# Altium PCB MDBU003_Layout.PcbDoc (part 1 of 2)
Units mil, origin at the board's own origin, x right, y up, seen from the top; angles counter-clockwise.
Board outline 2000 x 2200 mil, 4 copper layers (Component Side, Ground Plane, Power Plane, Solder Side), stack 31.834 mil thick; 88 components, 65 nets, 283 pads, 338 vias.
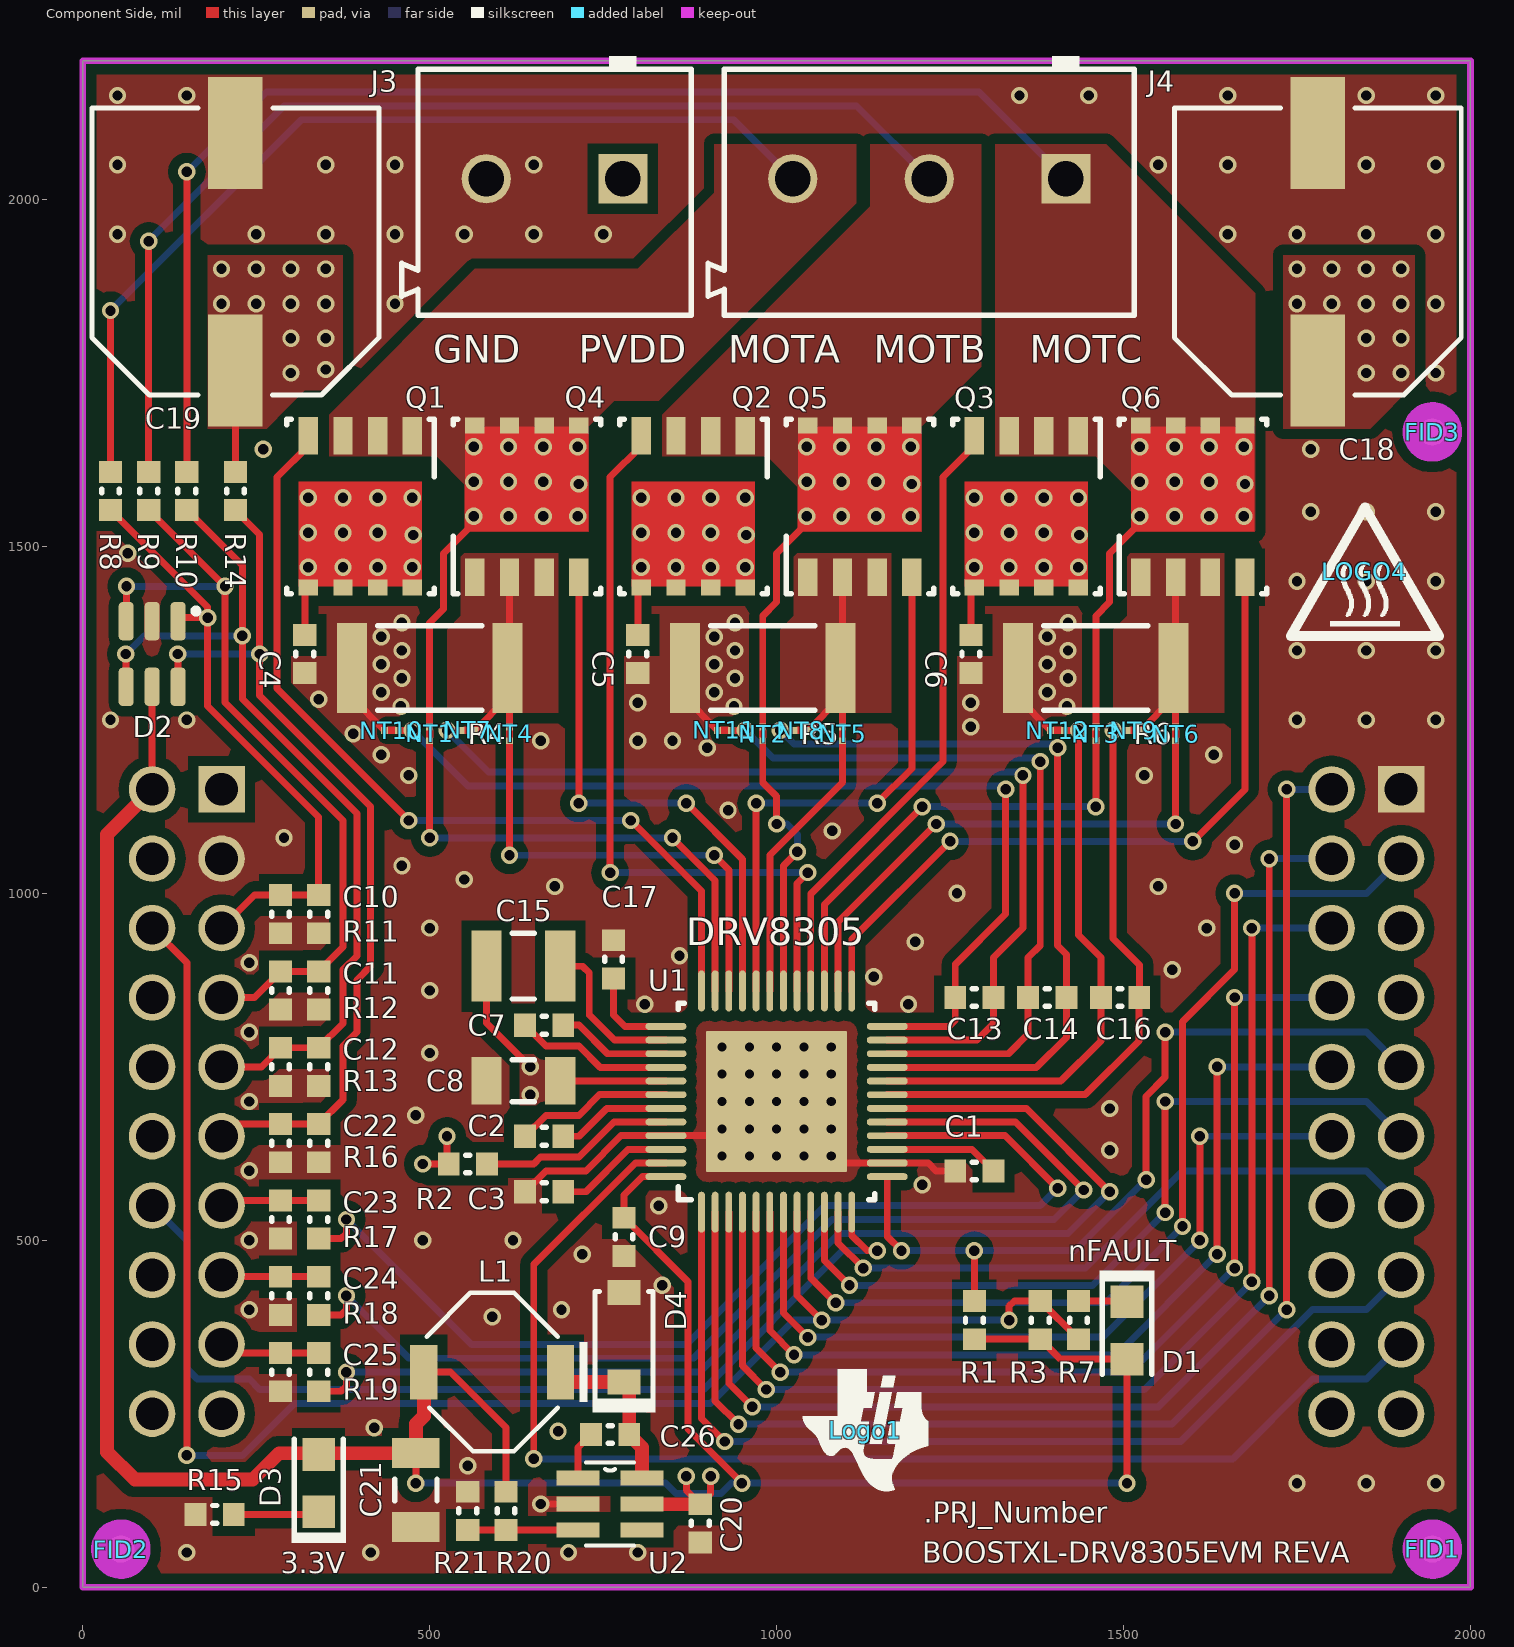
[diagram p0: Component Side view]
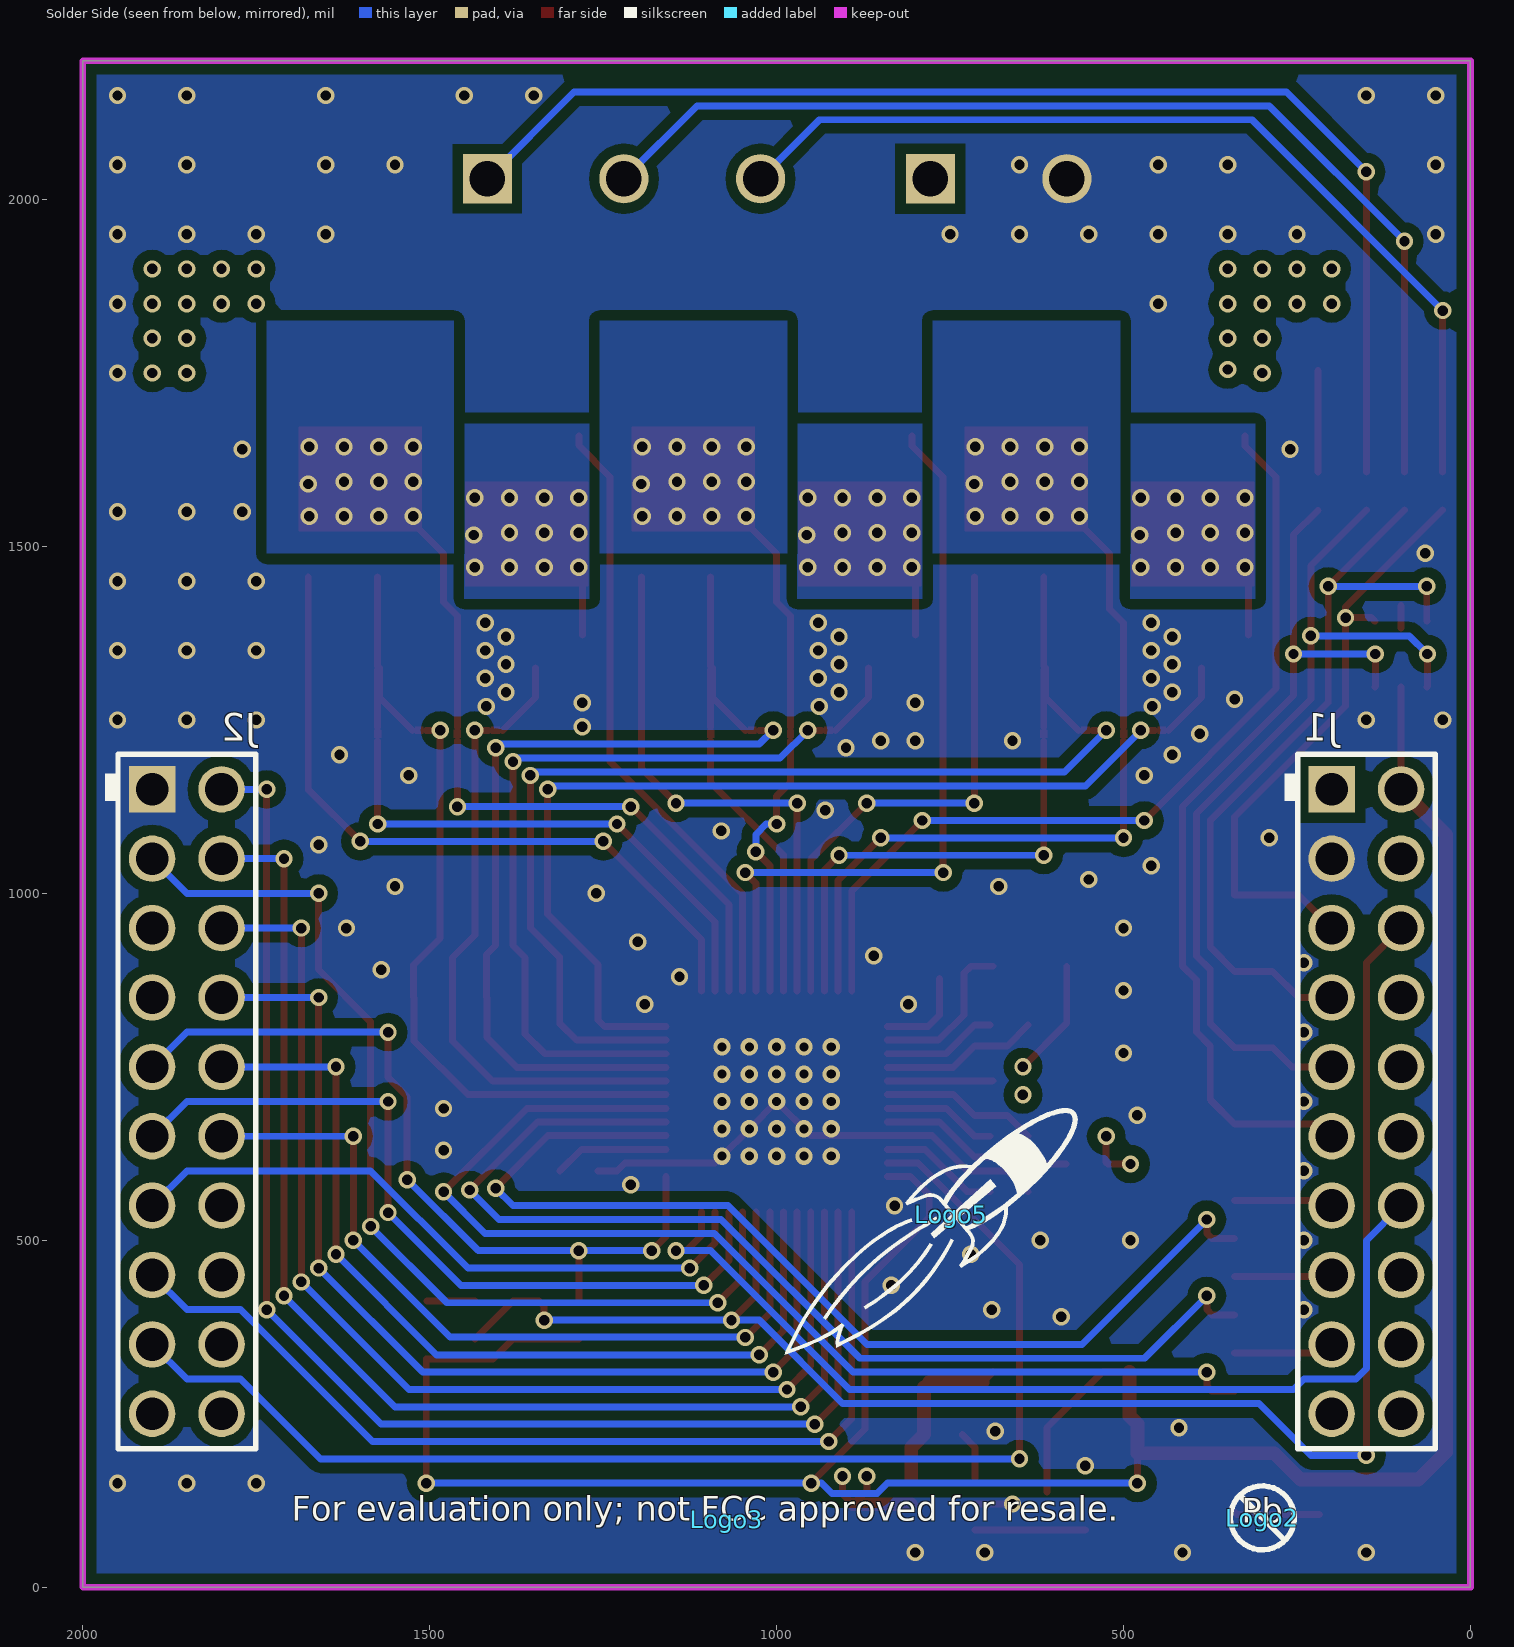
[diagram p1: Solder Side view, seen from below]
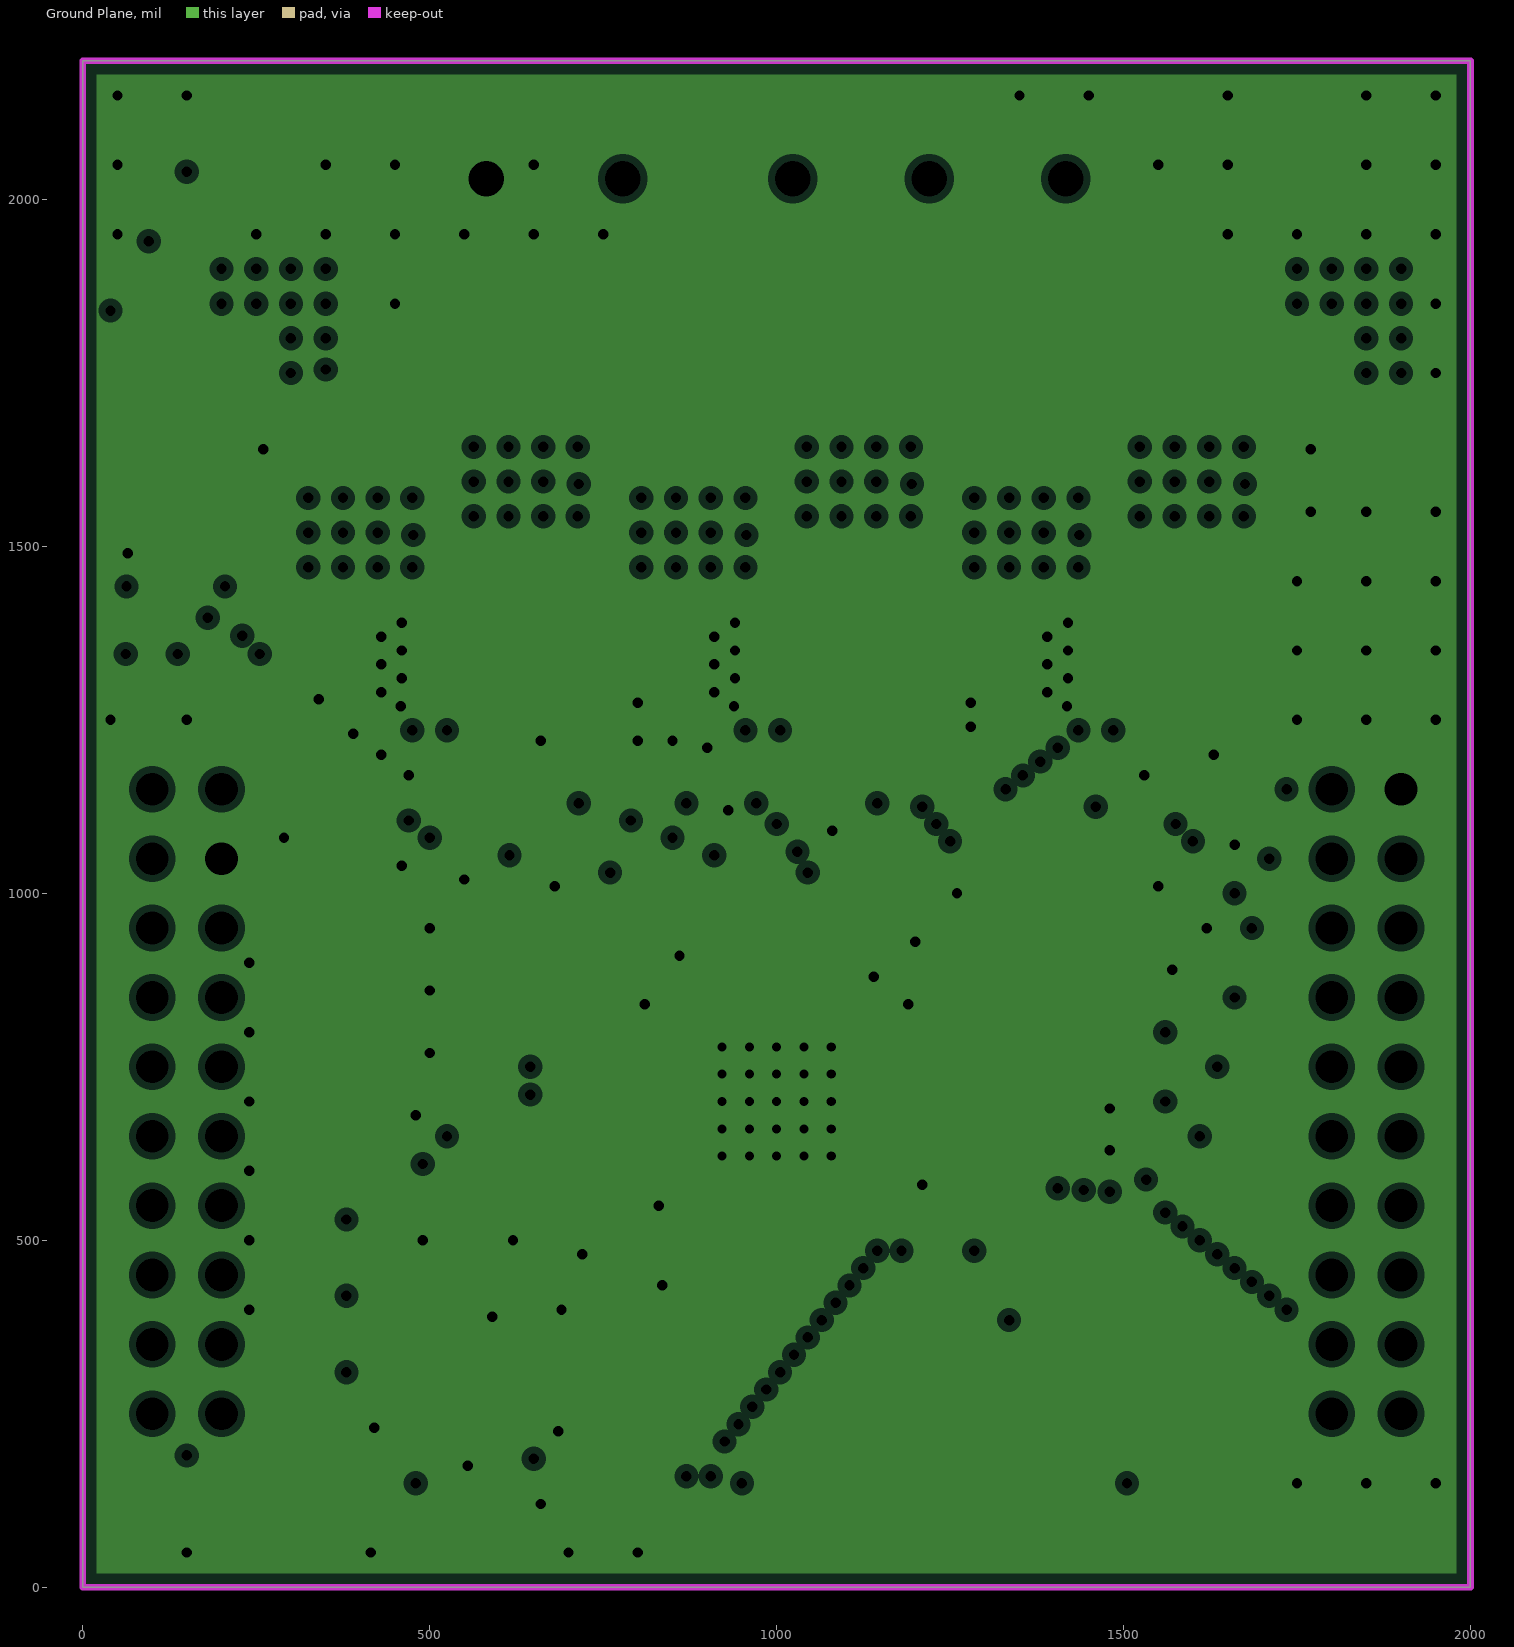
[diagram p2: Ground Plane, clearances drawn from the general rule]
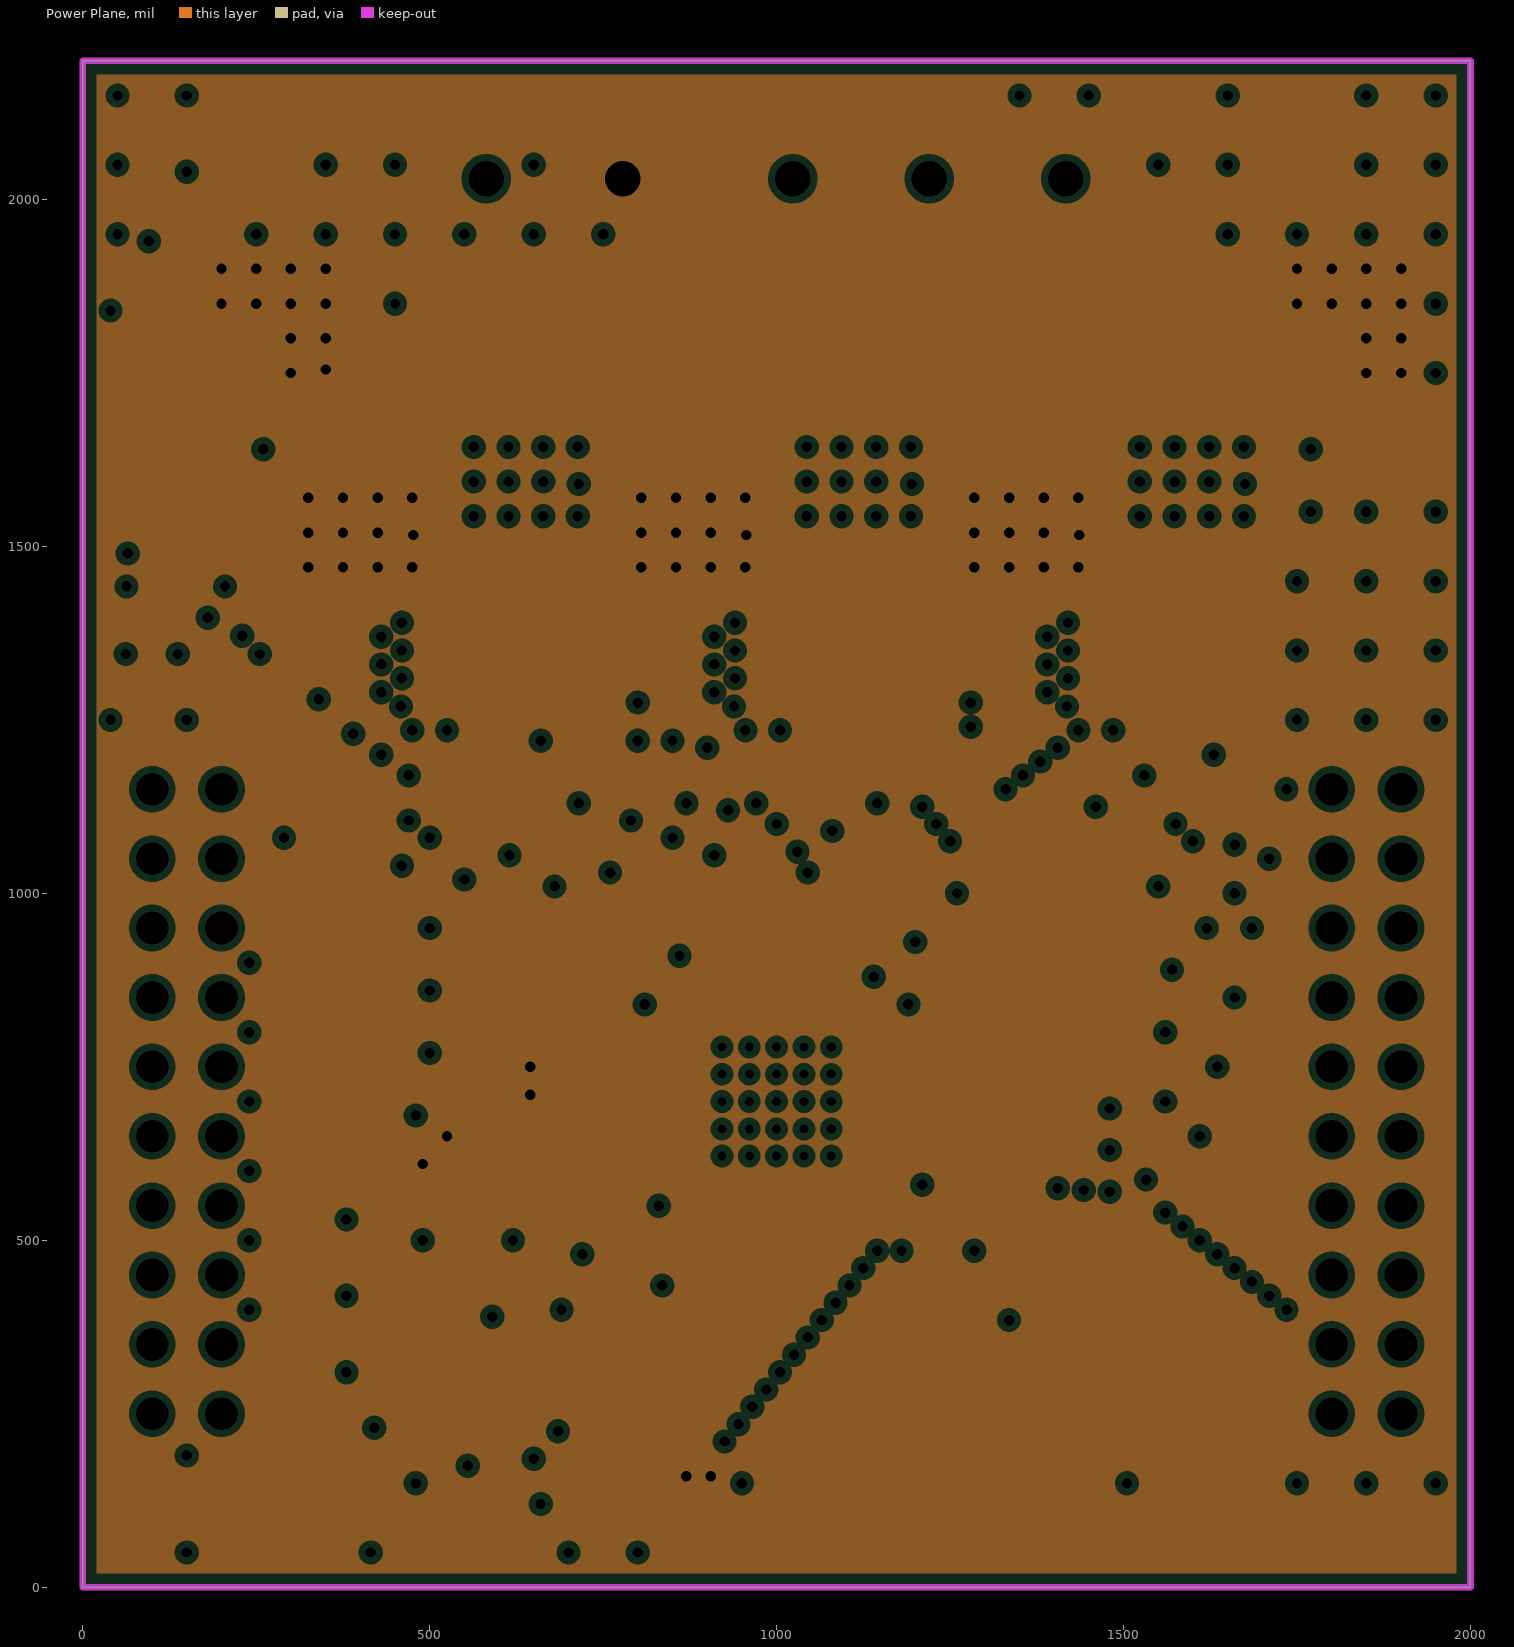
[diagram p3: Power Plane, clearances drawn from the general rule]

## Layer stack, top to bottom
Top Solder: solder mask 0.4, Solder Resist, Dk 3.5
Component Side: signal copper 2
Dielectric 1: prepreg 10, FR-4, Dk 4.2
Ground Plane: plane copper 1.417, net GND
Dielectric 3: core 5, Dk 4.2
Power Plane: plane copper 1.417, net PVDD
Dielectric 4: prepreg 10, Dk 4.2
Solder Side: signal copper 2
Bottom Solder: solder mask 0.4, Solder Resist, Dk 3.5

## Board outline
0,0 2000,0 2000,2200 0,2200

## Design rules (kind name [scope] priority, off if disabled: settings)
AcuteAngle [All] p1: minimum=4.50000000000000E+0001 checktracksonly=FALSE
AssemblyTestPointUsage [All] p1: valid=2
Clearance Clearance_Keepouts [((IsTrack Or IsArc) And Not InPoly) And IsFree and IsKeepOut vs ((IsTrack Or IsArc) And Not InPoly) And IsFree and IsKeepOut] p1: gap=0
Clearance Clearance_BoardEdge_MountingHoles [OnCopper and InComponentClass('Mounting Holes') vs IsKeepOut] p2: gap=40
Clearance Clearance_BoardEdge_Poly [OnCopper and InPoly vs IsKeepOut] p3: gap=15
Clearance Clearance_BoardEdge [OnCopper and Not InComponentClass('Logo') and not InComponentClass('FiducialMark') and not InRegion(1000,500,4000,800) and Not IsKeepout vs IsKeepOut] p4: gap=15
Clearance Clearance_Poly [InPolygon] p5: gap=15
Clearance [All] p6: gap=7
ComponentClearance ComponentClearance_MountingHoles_FiducialMarks [InComponentClass('Mounting Holes') vs InComponentClass('FiducialMark')] p1: gap=20 collisioncheckmode=3 verticalgap=10 showdistances=FALSE
ComponentClearance ComponentClearance_Shunt [InComponentClass('Header') vs InComponentClass('Shunt')] p2: gap=0 collisioncheckmode=3 verticalgap=0 showdistances=FALSE
ComponentClearance ComponentClearance_Logo [InComponentClass('Logo')] p3: gap=10 collisioncheckmode=3 verticalgap=10 showdistances=FALSE
ComponentClearance ComponentClearance_ScrewToNut [(HasFootprint('NY PMS 440 0025 PH')) vs (HasFootprint('Keystone_1902C'))] p4: gap=5 collisioncheckmode=3 verticalgap=10 showdistances=FALSE
ComponentClearance ComponentClearance_MountingHoles [InComponentClass('Mounting Holes')] p5: gap=250 collisioncheckmode=3 verticalgap=100000 showdistances=FALSE
ComponentClearance ComponentClearance_SmallPassives [HasFootprint('0201*') or HasFootprint('0402*') or HasFootprint('0508') or HasFootprint('0603*') or HasFootprint('0612') or HasFootprint('0805*') or HasFootprint('0815*') or HasFootprint('0830*') or HasFootprint('1206*') or HasFootprint('1210*') or HasFootprint('1808*') or HasFootprint('1812*') or HasFootprint('1825*') or HasFootprint('2010*') or HasFootprint('2220*') or HasFootprint('2225*') or HasFootprint('2512*') or HasFootprint('2728*') or HasFootprint('3518*') vs HasFootprint('0201*') or HasFootprint('0402*') or HasFootprint('0508') or HasFootprint('0603*') or HasFootprint('0612') or HasFootprint('0805*') or HasFootprint('0815*') or HasFootprint('0830*') or HasFootprint('1206*') or HasFootprint('1210*') or HasFootprint('1808*') or HasFootprint('1812*') or HasFootprint('1825*') or HasFootprint('2010*') or HasFootprint('2220*') or HasFootprint('2225*') or HasFootprint('2512*') or HasFootprint('2728*') or HasFootprint('3518*')] p6: gap=10 collisioncheckmode=3 verticalgap=10 showdistances=FALSE
ComponentClearance ComponentClearance_THtoSMT [IsThruComponent vs IsSMTComponent] p7: gap=10 collisioncheckmode=3 verticalgap=30 showdistances=FALSE
ComponentClearance ComponentClearance_THtoTH [IsThruComponent vs IsThruComponent] p8: gap=10 collisioncheckmode=3 verticalgap=30 showdistances=FALSE
ComponentClearance [All] p9: gap=10 collisioncheckmode=3 verticalgap=10 showdistances=FALSE
DiffPairsRouting [All] p1: maxlimit=100 minlimit=10 mostfreqgap=10 toplayer_minwidth=15 toplayer_maxwidth=15 toplayer_prefwidth=15 bottomlayer_minwidth=15 bottomlayer_maxwidth=15 bottomlayer_prefwidth=15 maxuncoupledlength=1000
FabricationTestPointUsage TestPointUsage [All] p1: valid=2 allowmultiple=FALSE
FabricationTestpoint Testpoint [All] p1: side=3 testpointundercomponent=TRUE minsize=40 maxsize=100 preferedsize=60 minholesize=0 maxholesize=40 preferedholesize=32 testpointgrid=1 allowsidetop=TRUE allowsidebottom=TRUE usegrid=TRUE gridtolerance=0.01
FanoutControl Fanout_LCC [IsLCC] p1: bgadir=Out bgaviamode=Centered fanoutstyle=Auto fanoutdirection=Alternating viagrid=1 // Fanout_LCC (Default Rule)
FanoutControl Fanout_BGA [IsBGA] p2: bgadir=Out bgaviamode=Centered fanoutstyle=Auto fanoutdirection=Alternating viagrid=1 // Fanout_BGA (Default Rule)
FanoutControl Fanout_Default [All] p4: bgadir=Out bgaviamode=Centered fanoutstyle=Auto fanoutdirection=Alternating viagrid=1 // Fanout_Default (Default Rule)
FanoutControl Fanout_Small [(CompPinCount < 5)] p5: bgadir=Out bgaviamode=Centered fanoutstyle=Auto fanoutdirection=OutThenIn viagrid=1 // Fanout_Small (Default Rule)
HoleSize [All] p1: absolutevalues=TRUE maxlimit=251 minlimit=8 maxpercent=80.000 minpercent=20.000
MinimumAnnularRing MinimumAnnularRing_ThermalPadVias [IsVia and InAnyComponent] p1: minimumring=5.91
MinimumAnnularRing [All] p2: minimumring=5
MinimumSolderMaskSliver MinimumSolderMaskSliver_Logo [InComponentClass('Logo') vs InComponentClass('Logo')] p1: minsoldermaskwidth=0.7
MinimumSolderMaskSliver [All] p2: minsoldermaskwidth=3.94
PlaneClearance [All] p1: clearance=10
PlaneConnect [All] p1: planeconnectstyle=Relief reliefexpansion=10 reliefentries=4 reliefconductorwidth=10 reliefairgap=10
PolygonConnect [All] p1: connectstyle=Direct reliefconductorwidth=10 reliefentries=4 polygonreliefangle="90 Angle" airgapwidth=10
RoutingVias ThermalPadVias [IsVia and InAnyComponent] p1: holewidth=7.87 width=19.68 viastyle="Through Hole" minholewidth=7.87 minwidth=19.68 maxholewidth=15 maxwidth=25
RoutingVias [All] p2: holewidth=15 width=25 viastyle="Through Hole" minholewidth=7.87 minwidth=20 maxholewidth=40 maxwidth=65
SilkToBoardRegionClearance [Not ((IsComment or IsDesignator) And (Hide <> 'False')) and not InRegion(1000,500,4000,800)] p1:
SilkToSilkClearance SilkToSilkClearance_Pb-FreeLogo [(HasFootprint('Pb-Free_Overlay_Medium') OR HasFootprint('Pb-Free_Overlay_Small')) vs (HasFootprint('Pb-Free_Overlay_Medium') OR HasFootprint('Pb-Free_Overlay_Small'))] p1: silktosilkclearance=0
SilkToSilkClearance [All] p2: silktosilkclearance=5
SilkToSolderMaskClearance "Silk to Solder Mask Opening" [All] p1: minsilkscreentomaskgap=1 clearancetoexposedcopper=FALSE
SolderMaskExpansion [All] p1: expansion=1.97
UnpouredPolygon [All] p1: allowunpoured=FALSE
Width [All] p1: maxlimit=100 minlimit=6 preferedwidth=10 checkconnectedcopper=TRUE
13 further rules are at their usual default settings.

## Classes and differential pairs
component class MDBU003_Schematic: C1 C2 C3 C4 C5 C6 C7 C8 C9 C10 C11 C12 C13 C14 C15 C16 C17 C18 C19 C20 C21 C22 C23 C24 C25 C26 D1 D2 D3 D4 J1 J2 J3 J4 L1 NT1 NT2 NT3 NT4 NT5 NT6 NT7 NT8 NT9 NT10 NT11 NT12 Q1 Q2 Q3 Q4 Q5 Q6 R1 R2 R3 R4 R5 R6 R7 R8 R9 R10 R11 R12 R13 R14 R15 R16 R17 R18 R19 R20 R21 U1 U2
component class AssemblyNote: ZZ1 ZZ2 ZZ3 ZZ4
component class FiducialMark: FID1 FID2 FID3
component class MDBU003_Hardware: FID1 FID2 FID3 Logo1 Logo2 Logo3 LOGO4 Logo5 ZZ1 ZZ2 ZZ3 ZZ4
component class Logo: Logo1

## Components (designator, comment, footprint, x,y, rotation, side; value= is the part's Value field where it differs from the comment)
C1 "C1608X7R1C105K" 0603L 1285,600 r0 top
C2 "C0603C473K1RACTU" 0603L 665,650 r180 top
C3 "C1608X7R1C105K" 0603L 665,570 r0 top
C4 "UMK107AB7105KA-T" 0603L 320,1345 r270 top
C5 "UMK107AB7105KA-T" 0603L 800,1345 r270 top
C6 "UMK107AB7105KA-T" 0603L 1280,1345 r270 top
C7 "C0603C473K1RACTU" 0603L 665,810 r180 top
C8 "GRM31CR71H475KA12L" 1206L 635,730 r0 top
C9 "C1608X7R1C105K" 0603L 780,505 r90 top
C10 "C0603C104J4RACTU" 0603L 285,970 r270 top
C11 "C0603C104J4RACTU" 0603L 285,860 r270 top
C12 "C0603C104J4RACTU" 0603L 285,750 r270 top
C13 "GRM188R71C102KA01D" 0603L 1285,850 r180 top
C14 "GRM188R71C102KA01D" 0603L 1390,850 r180 top
C15 "GRM32ER72A225KA35L" 1210L 635,895 r0 top
C16 "GRM188R71C102KA01D" 0603L 1495,850 r180 top
C17 "C1608X7R1C105K" 0603L 765,905 r90 top
C18 "EEE-FT1H331AP" SM_RADIAL_G 1780,1925 r90 top
C19 "EEE-FT1H331AP" SM_RADIAL_G 220,1925 r90 top
C20 "UMK107AB7105KA-T" 0603L 890,92 r270 top
C21 "GRM31CR71A226KE15L" 1206L 480,140 r270 top
C22 "C0603C104J4RACTU" 0603L 285,640 r270 top
C23 "GRM188R71C222KA01D" 0603L 285,530 r270 top
C24 "GRM188R71C222KA01D" 0603L 285,420 r270 top
C25 "GRM188R71C222KA01D" 0603L 285,310 r270 top
C26 "GRM188R71C334KA01D" 0603L 760,220 r180 top
D1 "LTST-C170KRKT" LED_LTST-C170 1505,370 r90 top
D2 "NUP4201MR6T1G" TSOP-6 100,1345 r270 top
D3 "LTST-C171GKT" LED_LTST-C171 340,150 r270 top
D4 "MBR1H100SFT3G" SOD-123FL 780,360 r90 top
FID1 "Fiducial" Fiducial10-20 1945,55 r0 top
FID2 "Fiducial" Fiducial10-20 55,55 r0 top
FID3 "Fiducial" Fiducial10-20 1945,1665 r0 top
J1 "CRD-081413-A-G" Major_CRD-081413-A-x 150,700 r0 bottom
J2 "CRD-081413-A-G" Major_CRD-081413-A-x 1850,700 r0 bottom
J3 "691 101 710 002" Wurth_691101710002 680,2030 r180 top
J4 "691 101 710 003" Wurth_691101710003 1220,2030 r180 top
L1 "SD53-150-R" SD53 590,310 r180 top
Logo1 "Texas Instruments" TI_Symbol_Overlay_Small 1128,226 r0 top
Logo2 "Pb-Free Symbol" Pb-Free_Overlay_Small 300,100 r180 bottom
Logo3 "FCC disclaimer" FCC_disclaimer 1071.86,98.28 r180 bottom
LOGO4 "CAUTION HOT SURFACE" IEC_HotSurface_Small 1848,1464 r0 top
Logo5 "LaunchPad Rocket" LaunchPadRocket_Small 748,537 r180 bottom
NT1 "Net-Tie" Net-Tie_10mil 500,1230 r90 top net-tie
NT2 "Net-Tie" Net-Tie_10mil 980,1230 r90 top net-tie
NT3 "Net-Tie" Net-Tie_10mil 1460,1230 r90 top net-tie
NT4 "Net-Tie" Net-Tie_10mil 615,1230 r90 top net-tie
NT5 "Net-Tie" Net-Tie_10mil 1095,1230 r90 top net-tie
NT6 "Net-Tie" Net-Tie_10mil 1575,1230 r90 top net-tie
NT7 "Net-Tie" Net-Tie_10mil 555,1235 r0 top net-tie
NT8 "Net-Tie" Net-Tie_10mil 1035,1235 r0 top net-tie
NT9 "Net-Tie" Net-Tie_10mil 1515,1235 r0 top net-tie
NT10 "Net-Tie" Net-Tie_10mil 445,1235 r180 top net-tie
NT11 "Net-Tie" Net-Tie_10mil 925,1235 r180 top net-tie
NT12 "Net-Tie" Net-Tie_10mil 1405,1235 r180 top net-tie
Q1 "CSD18540Q5B" TRANS_NexFET_Q5B 400,1550 r270 top
Q2 "CSD18540Q5B" TRANS_NexFET_Q5B 880,1550 r270 top
Q3 "CSD18540Q5B" TRANS_NexFET_Q5B 1360,1550 r270 top
Q4 "CSD18540Q5B" TRANS_NexFET_Q5B 640,1565 r90 top
Q5 "CSD18540Q5B" TRANS_NexFET_Q5B 1120,1565 r90 top
Q6 "CSD18540Q5B" TRANS_NexFET_Q5B 1600,1565 r90 top
R1 "CRCW060310K0JNEA" 0603L 1285,385 r270 top
R2 "CRCW0603100RJNEA" 0603L 555,610 r180 top
R3 "CRCW060310K0JNEA" 0603L 1380,385 r270 top
R4 "CRE2512-FZ-R007E-3" 2512L 500,1325 r0 top
R5 "CRE2512-FZ-R007E-3" 2512L 980,1325 r0 top
R6 "CRE2512-FZ-R007E-3" 2512L 1460,1325 r0 top
R7 "CRCW0603330RJNEA" 0603L 1435,385 r90 top
R8 "RC0603FR-0762KL" 0603L 40,1580 r90 top
R9 "RC0603FR-0762KL" 0603L 95,1580 r90 top
R10 "RC0603FR-0762KL" 0603L 150,1580 r90 top
R11 "RC0603FR-074K99L" 0603L 340,970 r90 top
R12 "RC0603FR-074K99L" 0603L 340,860 r90 top
R13 "RC0603FR-074K99L" 0603L 340,750 r90 top
R14 "RC0603FR-0762KL" 0603L 220,1580 r90 top
R15 "CRCW0603330RJNEA" 0603L 190,105 r0 top
R16 "RC0603FR-074K99L" 0603L 340,640 r90 top
R17 "CRCW060356R0JNEA" 0603L 340,530 r270 top
R18 "CRCW060356R0JNEA" 0603L 340,420 r270 top
R19 "CRCW060356R0JNEA" 0603L 340,310 r270 top
R20 "RC0603FR-0768KL" 0603L 610,110 r90 top
R21 "CRCW060320K0FKEA" 0603L 555,110 r270 top
U1 "DRV8305NPHPQ1" PHP0048G_L 1000,700 r90 top
U2 "LMR16006XDDC" DDC0006A_N 760,120 r0 top
ZZ1 "This Assembly Note is for PCB labels only" AssemblyNoteLabel 27,2664 r0 top
ZZ2 "These assemblies are ESD sensitive, ESD precautions shall be observed." AssemblyNote 27,2555.11 r0 top
ZZ3 "These assemblies must be clean and free from flux and all contaminants. Use of no clean flux is not acceptable." AssemblyNote 27,2466.56 r0 top
ZZ4 "These assemblies must comply with workmanship standards IPC-A-610 Class 2, unless otherwise specified." AssemblyNote 27,2378 r0 top

## Footprints (in the part's own frame and the unit in brackets; to place one, negate y for a bottom-side part, rotate by r counter-clockwise, add the part's x,y. Pads: shape width x height; smd on the part's side, far side on the other; paste and mask are expansions set on the pad)
0603L [mm] "0603 from SM-752 data"
  rect 0.8x0.85 smd: 1(-0.7,0) 2(0.7,0)
  silkscreen extent -0.07,-0.33 0.07,0.33, body extent -0.87,-0.47 0.87,0.47, height 0.85
1206L [mm] "1206 from SM-752 data"
  rect 1.1x1.75 smd: 1(-1.35,0) 2(1.35,0)
  silkscreen extent -0.4,-0.77 0.4,0.77, body extent -1.7,-0.9 1.7,0.9, height 1.35
1210L [mm] "1210 from SM-752 data"
  rect 1.1x2.6 smd: 1(-1.35,0) 2(1.35,0)
  silkscreen extent -0.4,-1.2 0.4,1.2, body extent -1.7,-1.35 1.7,1.35, height 1.35
2512L [mm] "Chip Resistor, Body 6.3x3.2mm, IPC High Density"
  rect 1.1x3.3 smd: 1(-2.85,0) 2(2.85,0)
  silkscreen extent -1.9,-1.55 1.9,1.55, body extent -3.22,-1.67 3.22,1.67, height 0.71
AssemblyNote [mil] "Assembly Note"
AssemblyNoteLabel [mil] "Assembly Note for PCB Labels"
DDC0006A_N [mil]
  rect 62x22 smd: 1(-46,37.4) 2(-46,0) 3(-46,-37.4) 4(46,-37.4) 5(46,0) 6(46,37.4)
  silkscreen extent -34,-60 34,60, body extent -56,-58 56,58, height 35
FCC_disclaimer [mil]
Fiducial10-20 [mm]
  round 1 smd mask+0.5: 1(0,0)
  Component Side keep-out circle w1.178: c0,0 r0.5
IEC_HotSurface_Small [mil]
  silkscreen extent -107,-93 107,92
LaunchPadRocket_Small [mil]
  silkscreen extent -241,-202 182,153
LED_LTST-C170 [mm] "LITE-ON"
  rect 1.2x1.2 smd: 1(-1.05,0) 2(1.05,0)
  silkscreen extent -1.6,-1 2.2,1, body extent -1.05,-0.67 1.05,0.67, height 1.1
LED_LTST-C171 [mm] "LITE-ON"
  rect 1.2x1.2 smd: 1(-1.05,0) 2(1.05,0)
  silkscreen extent -1.6,-1 2.2,1, body extent -1.05,-0.67 1.05,0.67, height 0.8
Major_CRD-081413-A-x [mm] "Receptacle, 2.54 mm, 10x2, TH"
  rect 1.7x1.7 hole 1.2: 1(1.27,-11.43)
  round 1.7 hole 1.2: 2(-1.27,-11.43) 3(1.27,-8.89) 4(-1.27,-8.89) 5(1.27,-6.35) 6(-1.27,-6.35) 7(1.27,-3.81) 8(-1.27,-3.81) 9(1.27,-1.27) 10(-1.27,-1.27) 11(1.27,1.27) 12(-1.27,1.27) 13(1.27,3.81) 14(-1.27,3.81) 15(1.27,6.35) 16(-1.27,6.35) 17(1.27,8.89) 18(-1.27,8.89) 19(1.27,11.43) 20(-1.27,11.43)
  silkscreen extent -2.52,-12.71 3,12.71, body extent -2.52,-12.71 2.52,12.71, height 8.64
Net-Tie_10mil [mil] "10mil net tie, no solder mask opening, no solder paste"
  rect 10x10 smd paste-5 mask-5: 1(-10,0) 2(10,0)
  Component Side region: -6,5 6,5 6,-5 -6,-5
Pb-Free_Overlay_Small [mil]
  silkscreen extent -46,-46 46,46
PHP0048G_L [mm] "TSQFP, 48-Leads, Body 7x7mm, Pitch 0.5mm, IPC High Density"
  rrect100% 1.5x0.25 smd: 1(-4.05,2.75) 2(-4.05,2.25) 3(-4.05,1.75) 4(-4.05,1.25) 5(-4.05,0.75) 6(-4.05,0.25) 7(-4.05,-0.25) 8(-4.05,-0.75) 9(-4.05,-1.25) 10(-4.05,-1.75) 11(-4.05,-2.25) 12(-4.05,-2.75) 25(4.05,-2.75) 26(4.05,-2.25) 27(4.05,-1.75) 28(4.05,-1.25) 29(4.05,-0.75) 30(4.05,-0.25) 31(4.05,0.25) 32(4.05,0.75) 33(4.05,1.25) 34(4.05,1.75) 35(4.05,2.25) 36(4.05,2.75)
  rrect100% 0.25x1.5 smd: 13(-2.75,-4.05) 14(-2.25,-4.05) 15(-1.75,-4.05) 16(-1.25,-4.05) 17(-0.75,-4.05) 18(-0.25,-4.05) 19(0.25,-4.05) 20(0.75,-4.05) 21(1.25,-4.05) 22(1.75,-4.05) 23(2.25,-4.05) 24(2.75,-4.05) 37(2.75,4.05) 38(2.25,4.05) 39(1.75,4.05) 40(1.25,4.05) 41(0.75,4.05) 42(0.25,4.05) 43(-0.25,4.05) 44(-0.75,4.05) 45(-1.25,4.05) 46(-1.75,4.05) 47(-2.25,4.05) 48(-2.75,4.05)
  rrect2% 5.17x5.17 smd: 49(0,0)
  silkscreen extent -3.6,-3.6 3.6,3.6, body extent -3.5,-3.5 3.5,3.5, height 1.2
SD53 [mm] "COOPER BUSSMAN"
  rect 1x2 smd: 1(-2.5,0) 2(2.5,0)
  silkscreen extent -3.5,-2.9 2.4,2.9, body extent -2.86,-2.86 2.86,2.86, height 3.01
SM_RADIAL_G [mm] "10 x 10.2mm:  Panasonic G"
  rect 4.1x2 smd: 1(-4.35,0) 2(4.35,0)
  silkscreen extent -5.25,-5.25 5.25,5.25, body extent -5.26,-5.26 5.26,5.26, height 10.5
SOD-123FL [mm] "Copied from SOD-123"
  rect 0.915x1.22 smd: 1(-1.637,0) 2(1.637,0)
  silkscreen extent -2.74,-1.16 1.68,1.16, body extent -1.9,-0.9 1.9,0.9, height 1
TI_Symbol_Overlay_Small [mil]
  silkscreen extent -90,-88 91,88
TRANS_NexFET_Q5B [mm] "TI recommended land pattern (nominal) November 2012"
  rect 1.372x0.71 smd paste-0.4: 1(-2.776,1.905) 2(-2.776,0.635) 3(-2.776,-0.635) 4(-2.776,-1.905)
  rect 0.59x0.71 smd paste-0.3: 5(2.776,-1.905) 6(2.776,-0.635) 7(2.776,0.635) 8(2.776,1.905)
  Component Side region: -1.106,-2.26 2.744,-2.26 2.744,2.26 -1.106,2.26
  silkscreen extent -3.38,-2.7 3,2.7, body extent -3.23,-2.55 2.87,2.55, height 1.06
TSOP-6 [mm] "TSOP, 6-Leads, Body 3.1x1.7mm (max), Pitch 0.95mm, IPC Medium Density"
  rrect50% 1.4x0.55 smd: 1(-1.2,0.95) 2(-1.2,0) 3(-1.2,-0.95) 4(1.2,-0.95) 5(1.2,0) 6(1.2,0.95)
  silkscreen extent -1.67,1.5 -1.48,1.7, body extent -1.37,-1.5 1.38,1.5, height 1.05
Wurth_691101710002 [mm] "Terminal Block, 5 mm, 2x1, TH"
  rect 1.8x1.8 hole 1.3: 1(-2.5,0)
  round 1.8 hole 1.3: 2(2.5,0)
  silkscreen extent -5,-4.5 5.6,5, body extent -5.6,-4 5.6,5, height 12.5
Wurth_691101710003 [mm] "Terminal Block, 5 mm, 3x1, TH"
  rect 1.8x1.8 hole 1.3: 1(-5,0)
  round 1.8 hole 1.3: 2(0,0) 3(5,0)
  silkscreen extent -7.5,-4.5 8.1,5, body extent -8.1,-4 8.1,5, height 12.5

## Part data
C1 C3 C9 C17: "CAP, CERM, 1 µF, 16 V, +/- 10%, X7R, 0603"
C2 C7: library part GRM188R72A104KA35D, "CAP, CERM, 0.047uF, 100V, +/-10%, X7R, 0603"
C4 C5 C6 C20: "CAP, CERM, 1 µF, 50 V, +/- 10%, X7R, 0603"
C8: "CAP, CERM, 4.7 µF, 50 V, +/- 10%, X7R, 1206"
C10 C11 C12 C22: "CAP, CERM, 0.1 µF, 16 V, +/- 5%, X7R, 0603"
C13 C14 C16: "CAP, CERM, 1000pF, 16V, +/-10%, X7R, 0603"
C15: "CAP, CERM, 2.2 µF, 100 V, +/- 10%, X7R, 1210"
C18 C19: library part EEE-FC1H221P, "CAP, AL, 330 µF, 50 V, +/- 20%, 0.3 ohm, SMD"
C21: "CAP, CERM, 22 µF, 10 V, +/- 10%, X7R, 1206"
C23 C24 C25: "CAP, CERM, 2200pF, 16V, +/-10%, X7R, 0603"
C26: "CAP, CERM, 0.33 µF, 16 V, +/- 10%, X7R, 0603"
D1: "LED, Red, SMD"
D2: "Transient Voltage Suppressors, 5 V, TSOP-6"
D3: "LED, Green, SMD"
D4: "Diode, Schottky, 100 V, 1 A, SOD-123FL"
FID1 FID2 FID3: "Fiducial mark.  There is nothing to buy or mount."
J1 J2: "Receptacle, 2.54 mm, 10x2, Gold, TH"
J3: "Terminal Block, 5 mm, 2x1, Tin, TH"
J4: "Terminal Block, 5 mm, 3x1, Tin, TH"
L1: "Inductor, Shielded Drum Core, Ferrite, 15 µH, 1.1 A, 0.122 ohm, SMD"
Logo1: library part TI_Logo, "Texas Instrument Corporate Signature"
Logo2: library part Pb-Free
Logo3: library part FCC_disclaimer, "FCC_disclaimer"
LOGO4: library part IEC_HotSurface, "IEC 61010-1 Hot Surface Warning"
Logo5: library part LaunchPad_Rocket, "LaunchPad Rocket logo"
NT1 NT2 NT3 NT4 NT5 NT6 NT7 NT8 NT9 NT10 NT11 NT12: "Single point connection between nets."
Q1 Q2 Q3 Q4 Q5 Q6: "MOSFET, N-CH, 60 V, 28 A, SON 5x6mm"
R1 R3: "RES, 10k ohm, 5%, 0.1W, 0603"
R2: "RES, 100 ohm, 5%, 0.1W, 0603"
R4 R5 R6: library part PMR100HZPFU7L00, "RES SMD 0.007 OHM 1% 3W 2512"
R7 R15: "RES, 330 ohm, 5%, 0.1W, 0603"
R8 R9 R10 R14: "RES, 62.0 k, 1%, 0.1 W, 0603"
R11 R12 R13 R16: "RES, 4.99 k, 1%, 0.1 W, 0603"
R17 R18 R19: "RES, 56 ohm, 5%, 0.1W, 0603"
R20: "RES, 68.0 k, 1%, 0.1 W, 0603"
R21: "RES, 20.0 k, 1%, 0.1 W, 0603"
U1: library part DRV83053EPHPRQ1, "Three Phase Automotive Gate Driver with Three Integrated Current Shunt Amplifiers and Voltage Regulator, PHP0048G"
U2: "Wide Input Voltage Range Buck Regulator with High Efficiency Sleep Mode, DDC0006A"
ZZ1: library part AssemblyNoteLabel
ZZ2 ZZ3 ZZ4: library part AssemblyNote

## Via types
v1: diameter 25, hole 15, Component Side to Solder Side, tented both sides, 313 vias
v2: diameter 25, hole 13, Component Side to Solder Side, tented top, 25 vias

## Nets (pads, with @x,y where several pads share a name; then routed paths per layer and width w, separated by ;. In a path a pad name is that pad's centre, name@x,y a point inside that pad or via, vN(x,y) a via of type N, cw(c..) or ccw(c..) an arc to the next point about the centre after c; other vN are vias at no path point)
3.3V: C9.2 C21.1 D1.1 D2.5 D3.1 J1.2 L1.2 R1.2 R3.2 R20.2 U1.48 | length 4021
  Component Side w10: J1.2@100,1150 D2.5@100,1297.76 ; v1(480,150) C21.1@480,193.15 ; L1.2@491.57,310 530,310 610,230 R20.2@610,137.56 ; U1.48@840.55,591.73 806.73,591.73 780,565 C9.2@780,532.56 872.32,440.23 872.32,228.03 v1@950.35,150 ; R1.2@1285,357.44 R3.2@1380,357.44 1408.78,328.66 D1.1@1505,328.66 v1(1505,150)
  Component Side w20: J1.2@100,1150 35,1085 35,195 75,155 245,155 283.15,193.15 C21.1@480,193.15 480,235 491.57,246.57 L1.2@491.57,310
  Solder Side w10: v1(480,150) 840,150 855,135 920,135 935,150 v1(1505,150)
  other v1: 950,150
AVDD: C1.2 U1.15 | length 166
  Component Side w10: U1.15@1159.45,631.1 1281.46,631.1 C1.2@1312.56,600
DVDD: C3.2 U1.46 | length 173.3
  Component Side w10: C3.2@692.56,570 725,570 786.1,631.1 U1.46@840.55,631.1
EN_GATE: J2.15 U1.1 | length 1418.7
  Component Side w10: U1.1@891.73,540.55 891.73,243.27 v1(925,210)
  Solder Side w10: v1(925,210) 1582.44,210 1772.44,400 1850,400 J2.15@1900,450
GH_A: Q1.4 U1.36 | length 1259.3
  Component Side w10: Q1.4@325,1659.3 325,1645 280,1600 280,1295 v1(470,1105) ; v1(790,1105) 891.73,1003.27 U1.36@891.73,859.45
  Solder Side w10: v1(470,1105) v1(790,1105)
GH_B: Q2.4 U1.29 | length 1109.9
  Component Side w10: v1(760,1030) 760,1600 805,1645 Q2.4@805,1659.3 ; U1.29@1029.53,859.45 1029.53,1014.53 v1(1045,1030)
  Solder Side w10: v1(760,1030) v1(1045,1030)
GH_C: Q3.4 U1.28 | length 897.5
  Component Side w10: U1.28@1049.21,859.45 1049.21,999.21 1240,1190 1240,1600.39 1285,1645.39 Q3.4@1285,1659.3
GL_A: Q4.4 U1.33 | length 784.7
  Component Side w10: v1(715,1130) Q4.4@715,1455.7 ; v1(870,1130) 950.79,1049.21 U1.33@950.79,859.45
  Solder Side w10: v1(715,1130) v1(870,1130)
GL_B: Q5.4 U1.32 | length 791.5
  Component Side w10: U1.32@970.47,859.45 v1(970.47,1130) ; v1(1145,1130) 1195,1180 Q5.4@1195,1455.7
  Solder Side w10: v1(970.47,1130) v1(1145,1130)
GL_C: Q6.4 U1.25 | length 1036
  Component Side w10: U1.25@1108.27,859.45 1108.27,933.27 v1(1250,1075) ; v1(1600,1075) 1675,1150 Q6.4@1675,1455.7
  Solder Side w10: v1(1250,1075) v1(1600,1075)
GND: C1.1 C3.1 C4.2 C5.2 C6.2 C8.1 C9.1 C10.2 C11.2 C12.2 C17.2 C18.2 C19.2 C20.2 C21.2 C22.2 C23.2 C24.2 C25.2 D2.2 D4.2 J1.3 J2.1 J3.2 NT10.2 NT11.2 NT12.2 R4.1 R5.1 R6.1 R11.1 R12.1 R13.1 R15.1 R16.1 R21.1 U1.14 U1.45 U1.49 U2.2 | length 1130.5
  Component Side w10: D2.2@100,1382.4 D2.2@100,1415 ; R4.1@387.8,1325 387.8,1282.2 NT10.2@435,1235 ; C3.1@637.44,570 667.44,600 725,600 775.79,650.79 U1.45@840.55,650.79 950.79,650.79 v2(1000,700) v2(1039.37,660.63) v2(1078.74,621.26) 1088.58,611.42 U1.14@1159.45,611.42 1218.58,611.42 1230,600 C1.1@1257.44,600 ; v1(660,120) U2.2@714,120 ; R5.1@867.8,1325 867.8,1282.2 NT11.2@915,1235 ; R6.1@1347.8,1325 1347.8,1282.2 NT12.2@1395,1235
  other v1: 150,50 415,50 700,50 800,50 1750,150 1850,150 1950,150 555,175 685,225 420,230 590,390 240,400 690,400 835,435 720,480 240,500 490,500 620,500 830,550 1210,580 240,600 1480,630 480,680 1480,690 240,700 500,770 240,800 810,840 1190,840 500,860 1140,880 1570,890 240,900 860,910 1200,930 500,950 1620,950 1260,1000 680,1010 1550,1010 550,1020 460,1040 1660,1070 290,1080 1080,1090 930,1120 470,1170 1530,1170 430,1200 1630,1200 900,1210 660,1220 800,1220 850,1220 390,1230 1280,1240 40,1250 150,1250 1750,1250 1850,1250 1950,1250 458.54,1269.42 938.54,1269.42 1418.54,1269.42 800,1275 1280,1275 340,1280 430,1290 910,1290 1390,1290 460,1310 940,1310 1420,1310 430,1330 910,1330 1390,1330 460,1350 940,1350 1420,1350 1750,1350 1850,1350 1950,1350 430,1370 910,1370 1390,1370 460,1390 940,1390 1420,1390 1750,1450 1850,1450 1950,1450 65,1490 1770,1550 1850,1550 1950,1550 260,1640 1770,1640 1950,1750 450,1850 1950,1850 50,1950 250,1950 350,1950 450,1950 550,1950 650,1950 750,1950 1650,1950 1750,1950 1850,1950 1950,1950 50,2050 350,2050 450,2050 650,2050 1550,2050 1650,2050 1850,2050 1950,2050 50,2150 150,2150 1350,2150 1450,2150 1650,2150 1850,2150 1950,2150
  other v2: 921.26,621.26 960.63,621.26 1000,621.26 1039.37,621.26 921.26,660.63 960.63,660.63 1000,660.63 1078.74,660.63 921.26,700 960.63,700 1039.37,700 1078.74,700 921.26,739.37 960.63,739.37 1000,739.37 1039.37,739.37 1078.74,739.37 921.26,778.74 960.63,778.74 1000,778.74 1039.37,778.74 1078.74,778.74
INH_A: J2.2 U1.2 | length 1992.8
  Component Side w10: U1.2@911.42,540.55 911.42,268.58 v1(945,235) ; v1(1735,400) v1(1735,1150)
  Solder Side w10: v1(945,235) 1570,235 v1(1735,400) ; v1(1735,1150) J2.2@1800,1150
INH_B: J2.6 U1.4 | length 1658.9
  Component Side w10: U1.4@950.79,540.55 950.79,319.21 v1(985,285) ; v1(1685,440) v1(1685,950)
  Solder Side w10: v1(985,285) 1530,285 v1(1685,440) ; v1(1685,950) J2.6@1800,950
INH_C: J2.10 U1.6 | length 1325
  Component Side w10: U1.6@990.16,540.55 990.16,369.84 v1(1025,335) ; v1(1635,480) v1(1635,750)
  Solder Side w10: v1(1025,335) 1490,335 v1(1635,480) ; v1(1635,750) J2.10@1800,750
INL_A: J2.4 U1.3 | length 1825.9
  Component Side w10: U1.3@931.1,540.55 931.1,293.9 v1(965,260) ; v1(1710,420) v1(1710,1050)
  Solder Side w10: v1(965,260) 1550,260 v1(1710,420) ; v1(1710,1050) J2.4@1800,1050
INL_B: J2.8 U1.5 | length 1492
  Component Side w10: U1.5@970.47,540.55 970.47,344.53 v1(1005,310) ; v1(1660,460) v1(1660,850)
  Solder Side w10: v1(1005,310) 1510,310 v1(1660,460) ; v1(1660,850) J2.8@1800,850
INL_C: J2.12 U1.7 | length 1157.9
  Component Side w10: U1.7@1009.84,540.55 1009.84,395.16 v1(1045,360) ; v1(1610,500) v1(1610,650)
  Solder Side w10: v1@1045,360.5 1470.5,360.5 v1(1610,500) ; v1(1610,650) J2.12@1800,650
ISEN_A: R17.2 U1.16 | length 1532.8
  Component Side w10: R17.2@340,502.44 372.44,502.44 380,510 v1(380,530) ; U1.16@1159.45,650.79 1329.21,650.79 v1(1405,575)
  Solder Side w10: v1(380,530) 560,350 870,350 1070,550 1380,550 v1(1405,575)
ISEN_B: R18.2 U1.17 | length 1587
  Component Side w10: R18.2@340,392.44 372.44,392.44 380,400 v1(380,420) ; U1.17@1159.45,670.47 1344.53,670.47 v1(1442.5,572.5)
  Solder Side w10: v1(380,420) 470,330 880,330 1080,530 1400,530 v1(1442.5,572.5)
ISEN_C: R19.2 U1.18 | length 1641.1
  Component Side w10: R19.2@340,282.44 372.44,282.44 380,290 v1(380,310) ; U1.18@1159.45,690.16 1359.84,690.16 v1(1480,570)
  Solder Side w10: v1(380,310) 889.84,310 1089.84,510 1420,510 v1(1480,570)
MOT_A: J4.3 NT1.2 Q1.1 Q1.2 Q1.3 Q4.5 Q4.6 Q4.7 Q4.8 R8.2 | length 1775
  Component Side w10: R8.2@40,1607.56 v1(40,1840) ; NT1.2@500,1240 500,1390 520,1410 520,1490 615,1585 625.62,1585 ; v1@558.54,1538.48 v1(563.54,1543.48)
  Solder Side w10: v1(40,1840) 315,2115 938.15,2115 J4.3@1023.15,2030
  other v1: 613.54,1543.48 663.54,1543.48 713.54,1543.48 715,1590 563.54,1593.48 613.54,1593.48 663.54,1593.48 563.54,1643.48 613.54,1643.48 663.54,1643.48 713.54,1643.48
MOT_B: J4.2 NT2.2 Q2.1 Q2.2 Q2.3 Q5.5 Q5.6 Q5.7 Q5.8 R9.2 | length 2009.7
  Component Side w10: R9.2@95,1607.56 v1(95,1940) ; NT2.2@980,1240 980,1400 1000,1420 1000,1490 1115,1605 ; v1@1038.54,1538.48 v1(1043.54,1543.48)
  Solder Side w10: v1(95,1940) 290,2135 1115,2135 J4.2@1220,2030
  other v1: 1093.54,1543.48 1143.54,1543.48 1193.54,1543.48 1195,1590 1043.54,1593.48 1093.54,1593.48 1143.54,1593.48 1043.54,1643.48 1093.54,1643.48 1143.54,1643.48 1193.54,1643.48
MOT_C: J4.1 NT3.2 Q3.1 Q3.2 Q3.3 Q6.5 Q6.6 Q6.7 Q6.8 R10.2 | length 2229.6
  Component Side w10: R10.2@150,1607.56 v1(150,2040) ; NT3.2@1460,1240 1460,1400 1480,1420 1480,1490 1590,1600 1600,1600 ; v1@1518.54,1538.48 v1(1523.54,1543.48)
  Solder Side w10: v1(150,2040) 265,2155 1291.85,2155 J4.1@1416.85,2030
  other v1: 1573.54,1543.48 1623.54,1543.48 1673.54,1543.48 1675,1590 1523.54,1593.48 1573.54,1593.48 1623.54,1593.48 1523.54,1643.48 1573.54,1643.48 1623.54,1643.48 1673.54,1643.48
NetC2_1: C2.1 U1.43 | length 164.6
  Component Side w10: C2.1@692.56,650 715,650 755.16,690.16 U1.43@840.55,690.16
NetC2_2: C2.2 U1.42 | length 227.9
  Component Side w10: C2.2@637.44,650 667.44,680 715,680 744.84,709.84 U1.42@840.55,709.84
NetC7_1: C7.1 U1.39 | length 165
  Component Side w10: C7.1@692.56,810 715,810 756.1,768.9 U1.39@840.55,768.9
NetC7_2: C7.2 U1.40 | length 228.3
  Component Side w10: C7.2@637.44,810 667.44,780 715,780 745.79,749.21 U1.40@840.55,749.21
NetC15_2: C15.2 U1.38 | length 231.6
  Component Side w10: C15.2@688.15,895 720,895 730,885 730,825 766.42,788.58 U1.38@840.55,788.58
NetC17_1: C17.1 U1.37 | length 134.9
  Component Side w10: C17.1@765,877.44 765,825 781.73,808.27 U1.37@840.55,808.27
NetC23_1: C23.1 J1.13 R17.1 | length 143.1
  Component Side w10: J1.13@200,550 207.56,557.56 C23.1@285,557.56 R17.1@340,557.56
NetC24_1: C24.1 J1.15 R18.1 | length 141
  Component Side w10: J1.15@200,450 202.44,447.56 C24.1@285,447.56 R18.1@340,447.56
NetC25_1: C25.1 J1.17 R19.1 | length 145.2
  Component Side w10: J1.17@200,350 212.44,337.56 C25.1@285,337.56 R19.1@340,337.56
NetC26_1: C26.1 D4.1 L1.1 U2.6 | length 246.5
  Component Side w10: L1.1@688.43,310 L1.1@702.89,295.53 ; D4.1@780,295.53 D4.1@787.56,287.97
  Component Side w20: L1.1@702.89,295.53 D4.1@780,295.53 ; D4.1@787.56,287.97 C26.1@787.56,220 806,201.56 U2.6@806,157.4
NetC26_2: C26.2 U2.1 | length 70.2
  Component Side w10: U2.1@714,157.4 714,201.56 C26.2@732.44,220
NetD1_2: D1.2 R7.2 | length 68.8
  Component Side w10: R7.2@1435,412.56 D1.2@1503.78,412.56
NetD3_2: D3.2 R15.2 | length 124
  Component Side w10: R15.2@217.56,105 336.34,105 D3.2@340,108.66
NetNT4_2: NT4.2 NT7.2 Q4.1 Q4.2 Q4.3 R4.2 | length 323.6
  Component Side w10: NT7.2@565,1235 612.2,1282.2 R4.2@612.2,1325 615,1322.2 NT4.2@615,1240 ; R4.2@615,1327.8 Q4.2@615,1455.7
NetNT5_2: NT5.2 NT8.2 Q5.1 Q5.2 Q5.3 R5.2 | length 323.6
  Component Side w10: NT8.2@1045,1235 1092.2,1282.2 R5.2@1092.2,1325 1095,1322.2 NT5.2@1095,1240 ; R5.2@1095,1327.8 Q5.2@1095,1455.7
NetNT6_2: NT6.2 NT9.2 Q6.1 Q6.2 Q6.3 R6.2 | length 323.6
  Component Side w10: NT9.2@1525,1235 1572.2,1282.2 R6.2@1572.2,1325 1575,1322.2 NT6.2@1575,1240 ; R6.2@1575,1327.8 Q6.2@1575,1455.7
NetR2_1: R2.1 U1.44 | length 283
  Component Side w10: R2.1@582.56,610 650,610 660,620 715,620 765.47,670.47 U1.44@840.55,670.47
NetR20_1: R20.1 R21.2 U2.3 | length 159.1
  Component Side w10: R21.2@555,82.44 R20.1@610,82.44 610.16,82.6 U2.3@714,82.6